# Altium PCB UA.PcbDoc
Units mil, origin at the board's own origin, x right, y up, seen from the top; angles counter-clockwise.
Board outline 2140 x 945 mil, 2 copper layers (Top Layer, Bottom Layer); 8 components, 8 nets, 45 pads, 0 vias.
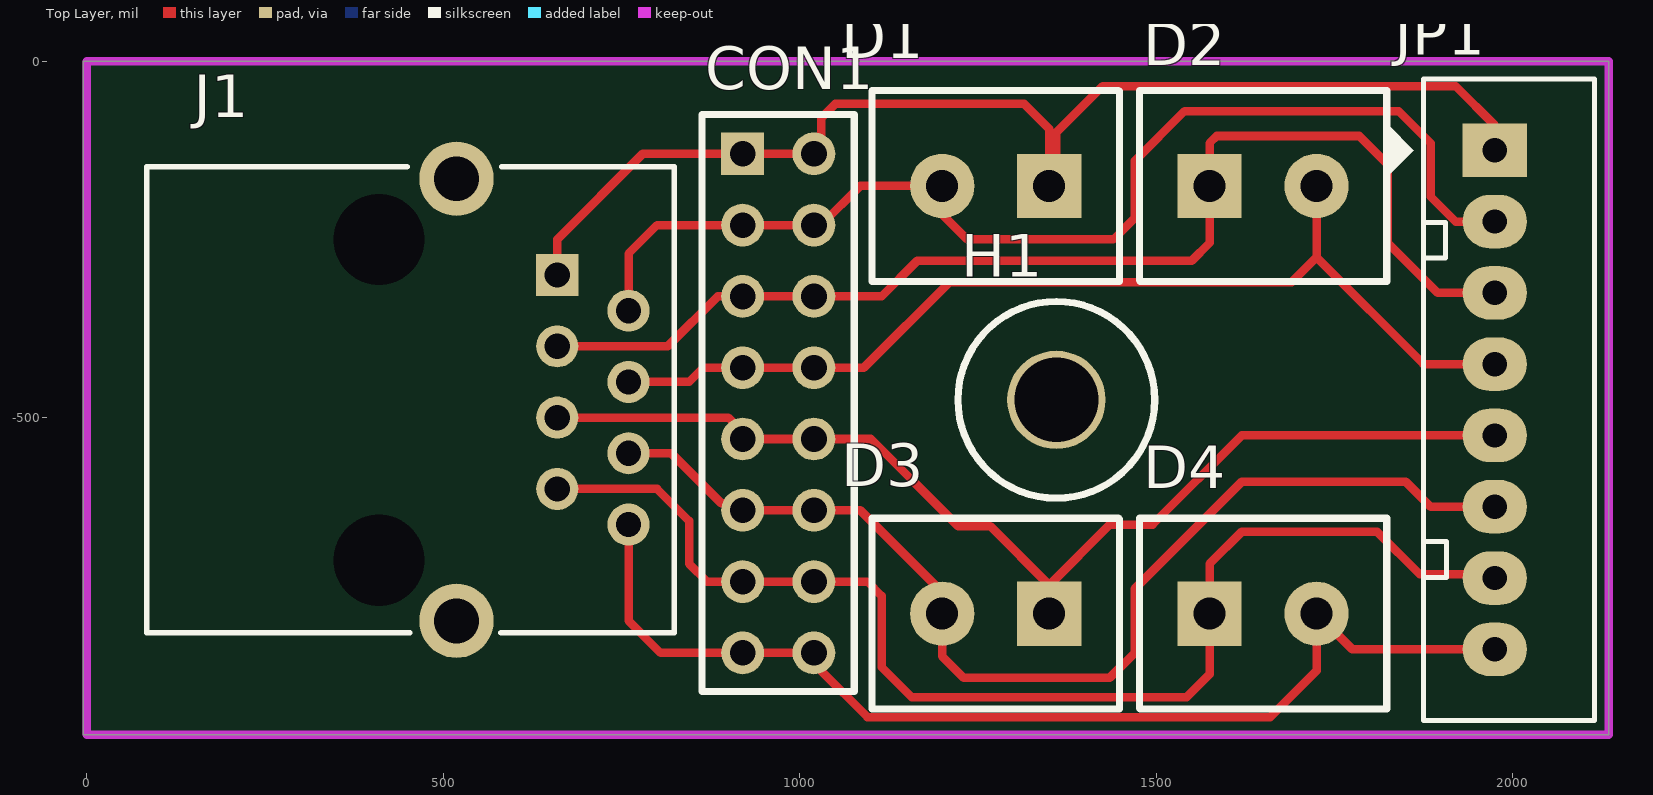
[diagram p0: Top Layer view]
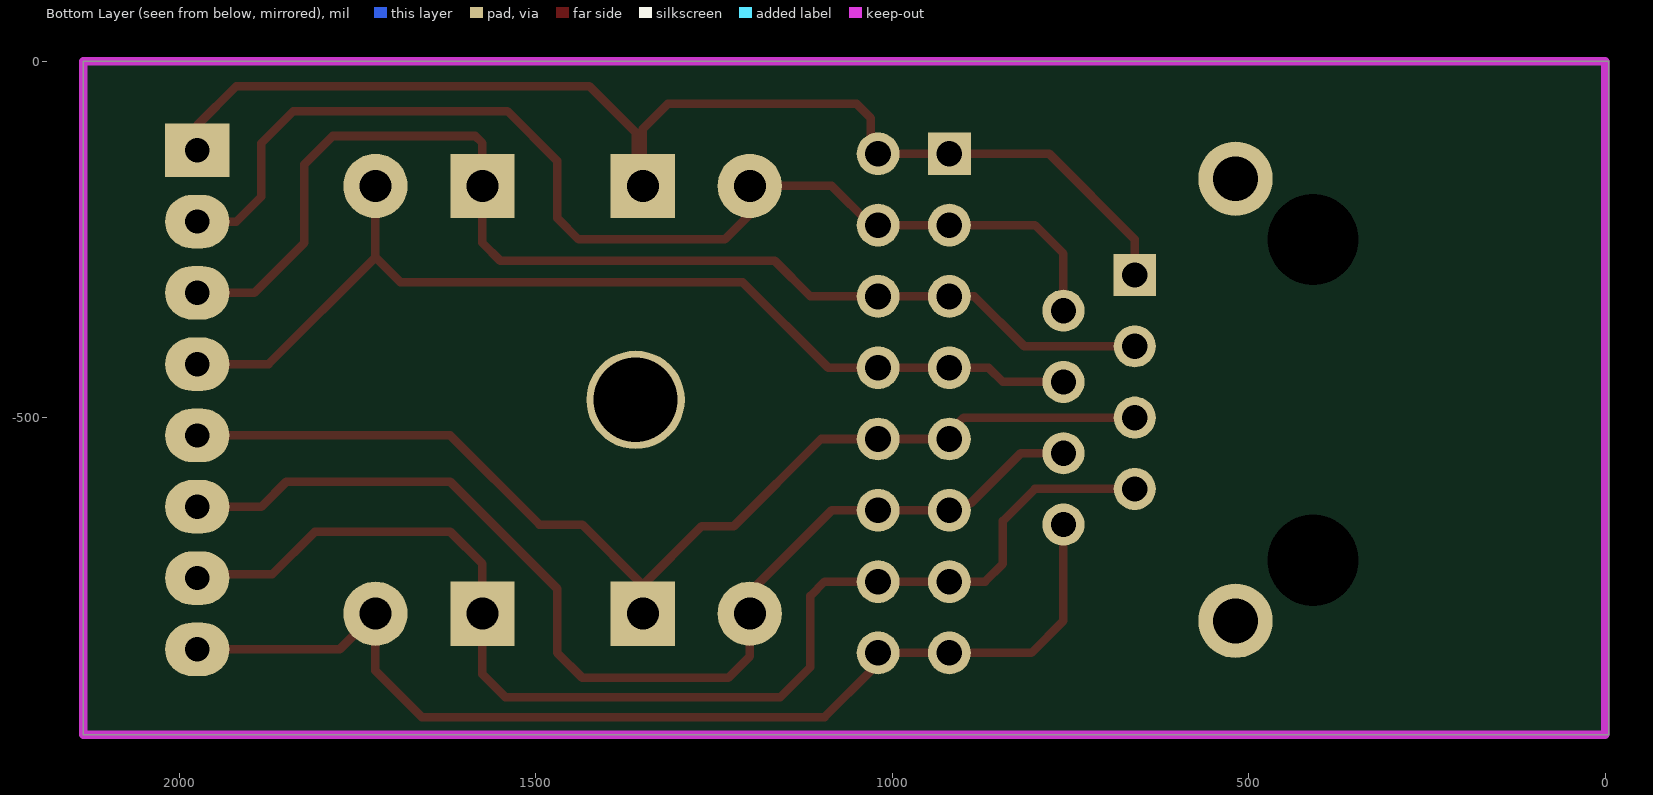
[diagram p1: Bottom Layer view, seen from below]

## Layer stack, top to bottom
Top Solder: solder mask 0.4, Solder Resist, Dk 3.5
Top Layer: signal copper 1.4
Dielectric 1: dielectric 12.6, FR-4, Dk 4.8
Bottom Layer: signal copper 1.4
Bottom Solder: solder mask 0.4, Solder Resist, Dk 3.5

## Board outline
-5,0 2135,0 2135,-945 -5,-945

## Design rules (kind name [scope] priority, off if disabled: settings)
Clearance [All] p1: gap=10
PolygonConnect [All] p1: connectstyle=Relief reliefconductorwidth=10 reliefentries=4 polygonreliefangle="90 Angle" airgapwidth=10
RoutingVias [All] p1: holewidth=28 width=50 viastyle="Through Hole" minholewidth=28 minwidth=50 maxholewidth=28 maxwidth=50
SolderMaskExpansion [All] p1: expansion=4
Width [All] p1: maxlimit=12 minlimit=10 preferedwidth=12 minimp=50.000000 maximp=50.000000 favimp=50.000000
29 further rules are at their usual default settings.

## Components (designator, comment, footprint, x,y, rotation, side; value= is the part's Value field where it differs from the comment)
CON1 "Con8x2" HEAD8x2 920,-130 r0 top
D1 "DOMINO" Domino2_small 1350,-175 r180 top
D2 "DOMINO" Domino2_small 1575,-175 r0 top
D3 "DOMINO" Domino2_small 1350,-775 r180 top
D4 "DOMINO" Domino2_small 1575,-775 r0 top
H1 "Hole 3mm" Hole_3mm 1360,-475 r0 top
J1 "CON-RJ45-10-RA" RJ45_TME 585,-475 r270 top
JP1 "JP8" CON8 1975,-125 r270 top

## Footprints (in the part's own frame and the unit in brackets; to place one, negate y for a bottom-side part, rotate by r counter-clockwise, add the part's x,y. Pads: shape width x height; smd on the part's side, far side on the other; paste and mask are expansions set on the pad)
CON8 [mil] "CON8"
  rect 75x90 hole 34: 1(0,0)
  oval 75x90 hole 34: 2(100,0) 3(200,0) 4(300,0) 5(400,0) 6(500,0) 7(600,0) 8(700,0)
  silkscreen extent -100,-150 800,140
Domino2_small [mm]
  rect 2.29x2.29 hole 1.14: 1(0,0)
  round 2.29 hole 1.14: 2(3.81,0)
  silkscreen extent -2.5,-3.4 6.31,3.4
HEAD8x2 [mil]
  rect 60x60 hole 36: 1(0,0)
  round 60 hole 36: 2(0,-100) 3(0,-200) 4(0,-300) 5(0,-400) 6(0,-500) 7(0,-600) 8(0,-700) 9(100,-700) 10(100,-600) 11(100,-500) 12(100,-400) 13(100,-300) 14(100,-200) 15(100,-100) 16(100,0)
  silkscreen extent -57,-754 156,55
Hole_3mm [mil]
  round 138 hole 118: 0(0,0)
  silkscreen extent -138,-138 138,138
RJ45_TME [mm] "no tranformer no LEDs"
  rect 1.5x1.5 hole 0.9: 1(-4.445,1.905)
  round 1.5 hole 0.9: 2(-3.175,4.445) 3(-1.905,1.905) 4(-0.635,4.445) 5(0.635,1.905) 6(1.905,4.445) 7(3.175,1.905) 8(4.445,4.445)
  round 2.65 hole 1.6: MH1(-7.875,-1.685) MH2(7.875,-1.685)
  round 2.95 hole 3.25 unplated: MH3(-5.715,-4.445) MH4(5.715,-4.445)
  Bottom Layer lines w0.3: -5.7,-4.46 -5.715,-4.445
  silkscreen extent -8.3,-12.72 8.3,6.08

## Part data
D1 D2 D3 D4: library part "Domino 2"
H1: library part Hole_3mm
J1: "Right Angle, Standard Profile, External Shield PCB Jack"
JP1: library part Con8, "Connector 8"

## Nets (pads, with @x,y where several pads share a name; then routed paths per layer and width w, separated by ;. In a path a pad name is that pad's centre, name@x,y a point inside that pad or via, vN(x,y) a via of type N, cw(c..) or ccw(c..) an arc to the next point about the centre after c; other vN are vias at no path point)
1: CON1.1 CON1.16 D1.1 J1.1 JP1.1 | length 1695.5
  Top Layer w12: J1.1 660.04,-249.96 780,-130 CON1.16 1030,-120 1030,-80 1050,-60 1315,-60 1350,-95 1350,-145 D1.1@1360,-155 ; D1.1@1360,-175 1360,-100 1425,-35 1920,-35 1975,-90 JP1.1
2: CON1.2 CON1.15 D1.2 J1.2 JP1.2 | length 1618.4
  Top Layer w12: J1.2 760.04,-270.04 760,-270 800,-230 CON1.15 1030,-230 1085,-175 D1.2 1200,-215 1235,-250 1440,-250 1470,-220 1470,-140 1540,-70 1840,-70 1885,-115 1885,-190 1920,-225 JP1.2
3: CON1.3 CON1.14 D2.1 J1.3 JP1.3 | length 1674.7
  Top Layer w12: J1.3 815,-400 885,-330 1115,-330 1165,-280 1550,-280 1575,-255 D2.1 1575,-115 1585,-105 1785,-105 1825,-145 1825,-255 1895,-325 JP1.3
4: CON1.4 CON1.13 D2.2 J1.4 JP1.4 | length 1449.6
  Top Layer w12: J1.4 845,-450 865,-430 1090,-430 1210,-310 1690,-310 1725,-275 ; D2.2 1725,-275 ; JP1.4 1875,-425 1725,-275
5: CON1.5 CON1.12 D3.1 J1.5 JP1.5 | length 1513.4
  Top Layer w12: J1.5 900,-500 930,-530 1100,-530 1222.5,-652.5 1267.5,-652.5 D3.1@1350,-735 ; D3.1@1360,-745 D3.1@1350,-735 ; JP1.5 1620,-525 1495,-650 1435,-650 D3.1@1350,-735
6: CON1.6 CON1.11 D3.2 J1.6 JP1.6 | length 1579.3
  Top Layer w12: J1.6 820,-550 890,-620 920,-620 930,-630 1085,-630 1200,-745 D3.2 1200,-835 1230,-865 1435,-865 1470,-830 1470,-740 1620,-590 1850,-590 1885,-625 JP1.6
7: CON1.7 CON1.10 D4.1 J1.7 JP1.7 | length 1747.6
  Top Layer w12: J1.7 800,-600 845,-645 845,-705 870,-730 1095,-730 1115,-750 1115,-850 1157,-892 1543,-892 1575,-860 1575,-785 D4.1@1585,-775 ; D4.1 1575,-705 1620,-660 1810,-660 1870,-720 1970,-720 JP1.7
8: CON1.8 CON1.9 D4.2 J1.8 JP1.8 | length 1542.3
  Top Layer w12: J1.8 760.04,-785.04 805,-830 1030,-830 1030,-855 1095,-920 1660,-920 1725,-855 1725,-810 1735,-800 D4.2@1735,-785 ; D4.2 D4.2@1735,-785 ; JP1.8 1775,-825 D4.2@1735,-785
pads on no net: H1.0 J1.MH1 J1.MH2 J1.MH3 J1.MH4

## Keep-outs
Keep-Out Layer:
  lines w11.81: 0,-945 0,0 2135,0 2135,-945 0,-945